# Altium PCB PDB.PcbDoc
Units mil, origin at the board's own origin, x right, y up, seen from the top; angles counter-clockwise.
Board outline 3900 x 2400 mil, 2 copper layers (Top Layer, Bottom Layer); 19 components, 6 nets, 44 pads, 695 vias.
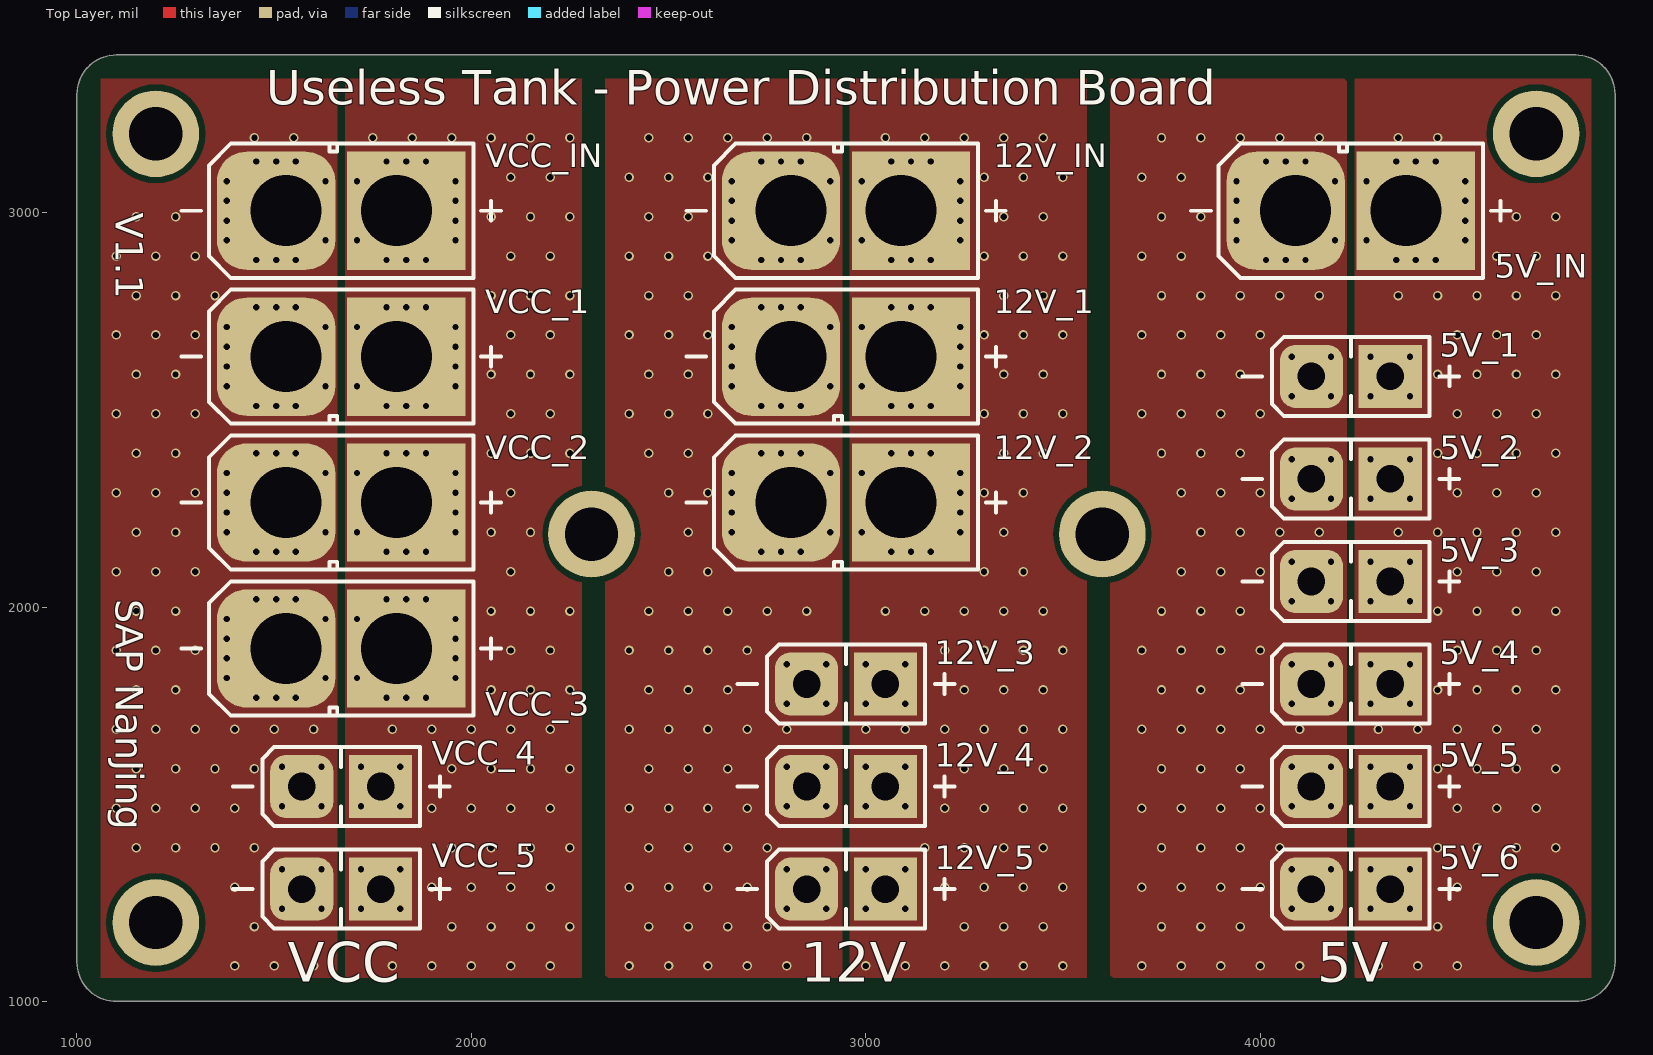
[diagram p0: Top Layer view]
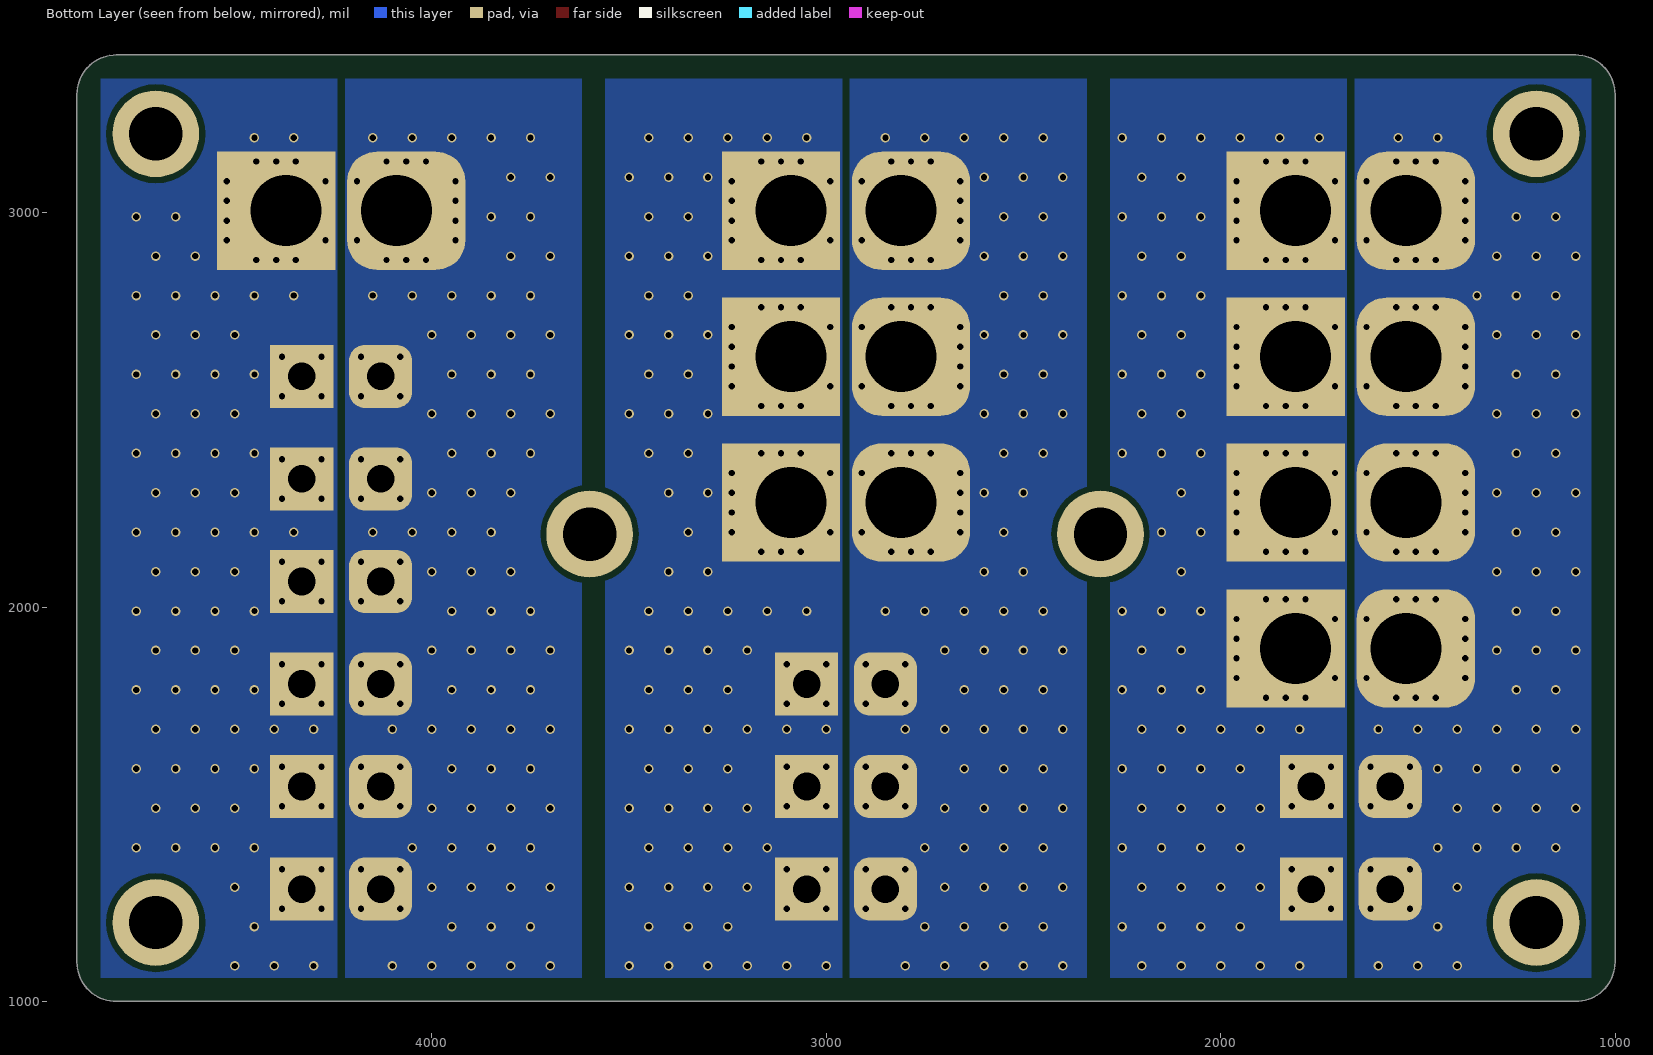
[diagram p1: Bottom Layer view, seen from below]

## Layer stack, top to bottom
Top Solder: solder mask 0.4, Solder Resist, Dk 3.5
Top Layer: signal copper 1.4
Dielectric 1: dielectric 12.6, FR-4, Dk 4.8
Bottom Layer: signal copper 1.4
Bottom Solder: solder mask 0.4, Solder Resist, Dk 3.5

## Board outline
1000,1100 1000,3300 cw(c1100,3300) 1100,3400 4800,3400 cw(c4800,3300) 4900,3300 4900,1100 cw(c4800,1100) 4800,1000 1100,1000 cw(c1100,1100)

## Design rules (kind name [scope] priority, off if disabled: settings)
Clearance [All] p1: gap=15
HoleSize [All] p1: absolutevalues=TRUE maxlimit=200 minlimit=12 maxpercent=80.000 minpercent=20.000
PolygonConnect "Full Connect" [All] p1: connectstyle=Direct reliefconductorwidth=10 reliefentries=4 polygonreliefangle="90 Angle" airgapwidth=10
PolygonConnect [All] p2: connectstyle=Relief reliefconductorwidth=10 reliefentries=4 polygonreliefangle="90 Angle" airgapwidth=10
RoutingVias [All] p1: holewidth=16 width=24 viastyle="Through Hole" minholewidth=8 minwidth=14 maxholewidth=50 maxwidth=80
SolderMaskExpansion [All] p1: expansion=4
Width [All] p1: maxlimit=10 minlimit=8 preferedwidth=10
29 further rules are at their usual default settings.

## Components (designator, comment, footprint, x,y, rotation, side; value= is the part's Value field where it differs from the comment)
5V_1 "Header XT30/60/90" XT30UPB-F 4130,2585 r0 top
5V_2 "Header XT30/60/90" XT30UPB-F 4130,2325 r0 top
5V_3 "Header XT30/60/90" XT30UPB-F 4130,2065 r0 top
5V_4 "Header XT30/60/90" XT30UPB-F 4130,1805 r0 top
5V_5 "Header XT30/60/90" XT30UPB-F 4130,1545 r0 top
5V_6 "Header XT30/60/90" XT30UPB-F 4130,1285 r0 top
5V_IN "Header XT30/60/90" XT60PB-M 4090,3005 r0 top
12V_1 "Header XT30/60/90" XT60PB-F 2810,2635 r0 top
12V_2 "Header XT30/60/90" XT60PB-F 2810,2265 r0 top
12V_3 "Header XT30/60/90" XT30UPB-F 2850,1805 r0 top
12V_4 "Header XT30/60/90" XT30UPB-F 2850,1545 r0 top
12V_5 "Header XT30/60/90" XT30UPB-F 2850,1285 r0 top
12V_IN "Header XT30/60/90" XT60PB-M 2810,3005 r0 top
VCC_1 "Header XT30/60/90" XT60PB-F 1530,2635 r0 top
VCC_2 "Header XT30/60/90" XT60PB-F 1530,2265 r0 top
VCC_3 "Header XT30/60/90" XT60PB-F 1530,1895 r0 top
VCC_4 "Header XT30/60/90" XT30UPB-F 1570,1545 r0 top
VCC_5 "Header XT30/60/90" XT30UPB-F 1570,1285 r0 top
VCC_IN "Header XT30/60/90" XT60PB-M 1530,3005 r0 top

## Footprints (in the part's own frame and the unit in brackets; to place one, negate y for a bottom-side part, rotate by r counter-clockwise, add the part's x,y. Pads: shape width x height; smd on the part's side, far side on the other; paste and mask are expansions set on the pad)
XT30UPB-F [mil]
  rrect50% 160x160 hole 70: GND(0,0)
  rect 160x160 hole 70: VCC(200,0)
  silkscreen extent -175,-100 375,100
XT60PB-F [mil]
  rrect50% 300x300 hole 180 copper offset -25,0: GND(0,0)
  rect 300x300 hole 180 copper offset 25,0: VCC(280,0)
  silkscreen extent -265,-170 545,170
XT60PB-M [mil]
  rrect50% 300x300 hole 180 copper offset -25,0: GND(0,0)
  rect 300x300 hole 180 copper offset 25,0: VCC(280,0)
  silkscreen extent -265,-170 545,170

## Free pads (board coordinates)
  round 220 hole 135: ""(1200,1200) ""(1200,3200) ""(2305,2185) ""(3600,2185) ""(4700,1200) ""(4700,3200)

## Via types
v1: diameter 24, hole 16, Top Layer to Bottom Layer, tented both sides, 415 vias
v2: diameter 24, hole 16, Top Layer to Bottom Layer, 280 vias

## Nets (pads, with @x,y where several pads share a name; then routed paths per layer and width w, separated by ;. In a path a pad name is that pad's centre, name@x,y a point inside that pad or via, vN(x,y) a via of type N, cw(c..) or ccw(c..) an arc to the next point about the centre after c; other vN are vias at no path point)
Net5V_1_GND: 5V_1.GND 5V_2.GND 5V_3.GND 5V_4.GND 5V_5.GND 5V_6.GND 5V_IN.GND
  other v1: 3700,1090 3800,1090 3900,1090 4000,1090 4100,1090 3750,1190 3850,1190 3950,1190 3700,1290 3800,1290 3900,1290 4000,1290 3750,1390 3850,1390 3950,1390 4050,1390 3700,1490 3800,1490 3900,1490 4000,1490 3750,1590 3850,1590 3950,1590 3700,1690 3800,1690 3900,1690 4000,1690 4100,1690 3750,1790 3850,1790 3950,1790 3700,1890 3800,1890 3900,1890 4000,1890 3750,1990 3850,1990 3950,1990 3800,2090 3900,2090 4000,2090 3850,2190 3950,2190 4050,2190 4150,2190 3800,2290 3900,2290 4000,2290 3750,2390 3850,2390 3950,2390 3700,2490 3800,2490 3900,2490 4000,2490 3750,2590 3850,2590 3950,2590 3700,2690 3800,2690 3900,2690 4000,2690 3750,2790 3850,2790 3950,2790 4050,2790 4150,2790 3700,2890 3800,2890 3750,2990 3850,2990 3700,3090 3800,3090 3750,3190 3850,3190 3950,3190 4050,3190 4150,3190
  other v2: 4080,1235 4180,1235 4080,1335 4180,1335 4080,1495 4180,1495 4080,1595 4180,1595 4080,1755 4180,1755 4080,1855 4180,1855 4080,2015 4180,2015 4080,2115 4180,2115 4080,2275 4180,2275 4080,2375 4180,2375 4080,2535 4180,2535 4080,2635 4180,2635 4015,2880 4065,2880 4115,2880 3940,2930 4190,2930 3940,2980 3940,3030 3940,3080 4190,3080 4015,3130 4065,3130 4115,3130
Net5V_1_VCC: 5V_1.VCC 5V_2.VCC 5V_3.VCC 5V_4.VCC 5V_5.VCC 5V_6.VCC 5V_IN.VCC
  other v1: 4300,1090 4400,1090 4500,1090 4450,1190 4500,1290 4450,1390 4550,1390 4650,1390 4750,1390 4500,1490 4600,1490 4700,1490 4450,1590 4550,1590 4650,1590 4750,1590 4300,1690 4400,1690 4500,1690 4600,1690 4700,1690 4450,1790 4550,1790 4650,1790 4750,1790 4500,1890 4600,1890 4700,1890 4450,1990 4550,1990 4650,1990 4750,1990 4500,2090 4600,2090 4700,2090 4350,2190 4450,2190 4550,2190 4650,2190 4750,2190 4500,2290 4600,2290 4700,2290 4450,2390 4550,2390 4650,2390 4750,2390 4500,2490 4600,2490 4700,2490 4450,2590 4550,2590 4650,2590 4750,2590 4500,2690 4600,2690 4700,2690 4350,2790 4450,2790 4550,2790 4650,2790 4750,2790 4600,2890 4700,2890 4650,2990 4750,2990 4350,3190 4450,3190
  other v2: 4280,1235 4380,1235 4280,1335 4380,1335 4280,1495 4380,1495 4280,1595 4380,1595 4280,1755 4380,1755 4280,1855 4380,1855 4280,2015 4380,2015 4280,2115 4380,2115 4280,2275 4380,2275 4280,2375 4380,2375 4280,2535 4380,2535 4280,2635 4380,2635 4345,2880 4395,2880 4445,2880 4270,2930 4520,2930 4520,2980 4520,3030 4270,3080 4520,3080 4345,3130 4395,3130 4445,3130
Net12V_1_GND: 12V_1.GND 12V_2.GND 12V_3.GND 12V_4.GND 12V_5.GND 12V_IN.GND
  other v1: 2400,1090 2500,1090 2600,1090 2700,1090 2800,1090 2450,1190 2550,1190 2650,1190 2750,1190 2400,1290 2500,1290 2600,1290 2700,1290 2450,1390 2550,1390 2650,1390 2750,1390 2400,1490 2500,1490 2600,1490 2700,1490 2450,1590 2550,1590 2650,1590 2400,1690 2500,1690 2600,1690 2700,1690 2800,1690 2450,1790 2550,1790 2650,1790 2400,1890 2500,1890 2600,1890 2700,1890 2450,1990 2550,1990 2650,1990 2750,1990 2850,1990 2500,2090 2600,2090 2550,2190 2500,2290 2600,2290 2450,2390 2550,2390 2400,2490 2500,2490 2600,2490 2450,2590 2550,2590 2400,2690 2500,2690 2600,2690 2450,2790 2550,2790 2400,2890 2500,2890 2600,2890 2450,2990 2550,2990 2400,3090 2500,3090 2600,3090 2450,3190 2550,3190 2650,3190 2750,3190 2850,3190
  other v2: 2800,1235 2900,1235 2800,1335 2900,1335 2800,1495 2900,1495 2800,1595 2900,1595 2800,1755 2900,1755 2800,1855 2900,1855 2735,2140 2785,2140 2835,2140 2660,2190 2910,2190 2660,2240 2660,2290 2660,2340 2910,2340 2735,2390 2785,2390 2835,2390 2735,2510 2785,2510 2835,2510 2660,2560 2910,2560 2660,2610 2660,2660 2660,2710 2910,2710 2735,2760 2785,2760 2835,2760 2735,2880 2785,2880 2835,2880 2660,2930 2910,2930 2660,2980 2660,3030 2660,3080 2910,3080 2735,3130 2785,3130 2835,3130
Net12V_1_VCC: 12V_1.VCC 12V_2.VCC 12V_3.VCC 12V_4.VCC 12V_5.VCC 12V_IN.VCC
  other v1: 3000,1090 3100,1090 3200,1090 3300,1090 3400,1090 3500,1090 3250,1190 3350,1190 3450,1190 3200,1290 3300,1290 3400,1290 3500,1290 3150,1390 3250,1390 3350,1390 3450,1390 3200,1490 3300,1490 3400,1490 3500,1490 3250,1590 3350,1590 3450,1590 3000,1690 3100,1690 3200,1690 3300,1690 3400,1690 3500,1690 3250,1790 3350,1790 3450,1790 3200,1890 3300,1890 3400,1890 3500,1890 3050,1990 3150,1990 3250,1990 3350,1990 3450,1990 3300,2090 3400,2090 3350,2190 3300,2290 3400,2290 3350,2390 3450,2390 3300,2490 3400,2490 3500,2490 3350,2590 3450,2590 3300,2690 3400,2690 3500,2690 3350,2790 3450,2790 3300,2890 3400,2890 3500,2890 3350,2990 3450,2990 3300,3090 3400,3090 3500,3090 3050,3190 3150,3190 3250,3190 3350,3190 3450,3190
  other v2: 3000,1235 3100,1235 3000,1335 3100,1335 3000,1495 3100,1495 3000,1595 3100,1595 3000,1755 3100,1755 3000,1855 3100,1855 3065,2140 3115,2140 3165,2140 2990,2190 3240,2190 3240,2240 3240,2290 2990,2340 3240,2340 3065,2390 3115,2390 3165,2390 3065,2510 3115,2510 3165,2510 2990,2560 3240,2560 3240,2610 3240,2660 2990,2710 3240,2710 3065,2760 3115,2760 3165,2760 3065,2880 3115,2880 3165,2880 2990,2930 3240,2930 3240,2980 3240,3030 2990,3080 3240,3080 3065,3130 3115,3130 3165,3130
NetVCC_1_GND: VCC_1.GND VCC_2.GND VCC_3.GND VCC_4.GND VCC_5.GND VCC_IN.GND
  other v1: 1400,1090 1500,1090 1600,1090 1450,1190 1400,1290 1150,1390 1250,1390 1350,1390 1450,1390 1100,1490 1200,1490 1300,1490 1400,1490 1150,1590 1250,1590 1350,1590 1450,1590 1100,1690 1200,1690 1300,1690 1400,1690 1500,1690 1600,1690 1150,1790 1250,1790 1100,1890 1200,1890 1300,1890 1150,1990 1250,1990 1100,2090 1200,2090 1300,2090 1150,2190 1250,2190 1100,2290 1200,2290 1300,2290 1150,2390 1250,2390 1100,2490 1200,2490 1300,2490 1150,2590 1250,2590 1100,2690 1200,2690 1300,2690 1150,2790 1250,2790 1350,2790 1100,2890 1200,2890 1300,2890 1150,2990 1250,2990 1450,3190 1550,3190
  other v2: 1520,1235 1620,1235 1520,1335 1620,1335 1520,1495 1620,1495 1520,1595 1620,1595 1455,1770 1505,1770 1555,1770 1380,1820 1630,1820 1380,1870 1380,1920 1380,1970 1630,1970 1455,2020 1505,2020 1555,2020 1455,2140 1505,2140 1555,2140 1380,2190 1630,2190 1380,2240 1380,2290 1380,2340 1630,2340 1455,2390 1505,2390 1555,2390 1455,2510 1505,2510 1555,2510 1380,2560 1630,2560 1380,2610 1380,2660 1380,2710 1630,2710 1455,2760 1505,2760 1555,2760 1455,2880 1505,2880 1555,2880 1380,2930 1630,2930 1380,2980 1380,3030 1380,3080 1630,3080 1455,3130 1505,3130 1555,3130
NetVCC_1_VCC: VCC_1.VCC VCC_2.VCC VCC_3.VCC VCC_4.VCC VCC_5.VCC VCC_IN.VCC
  other v1: 1800,1090 1900,1090 2000,1090 2100,1090 2200,1090 1950,1190 2050,1190 2150,1190 2250,1190 1900,1290 2000,1290 2100,1290 2200,1290 1950,1390 2050,1390 2150,1390 2250,1390 1900,1490 2000,1490 2100,1490 2200,1490 1950,1590 2050,1590 2150,1590 2250,1590 1800,1690 1900,1690 2000,1690 2100,1690 2200,1690 2050,1790 2150,1790 2250,1790 2100,1890 2200,1890 2050,1990 2150,1990 2250,1990 2100,2090 2050,2190 2150,2190 2100,2290 2050,2390 2150,2390 2250,2390 2100,2490 2200,2490 2050,2590 2150,2590 2250,2590 2100,2690 2200,2690 2050,2790 2150,2790 2250,2790 2100,2890 2200,2890 2050,2990 2150,2990 2250,2990 2100,3090 2200,3090 1750,3190 1850,3190 1950,3190 2050,3190 2150,3190 2250,3190
  other v2: 1720,1235 1820,1235 1720,1335 1820,1335 1720,1495 1820,1495 1720,1595 1820,1595 1785,1770 1835,1770 1885,1770 1710,1820 1960,1820 1960,1870 1960,1920 1710,1970 1960,1970 1785,2020 1835,2020 1885,2020 1785,2140 1835,2140 1885,2140 1710,2190 1960,2190 1960,2240 1960,2290 1710,2340 1960,2340 1785,2390 1835,2390 1885,2390 1785,2510 1835,2510 1885,2510 1710,2560 1960,2560 1960,2610 1960,2660 1710,2710 1960,2710 1785,2760 1835,2760 1885,2760 1785,2880 1835,2880 1885,2880 1710,2930 1960,2930 1960,2980 1960,3030 1710,3080 1960,3080 1785,3130 1835,3130 1885,3130

## Polygon pours and split planes (outlines as drawn)
Net5V_1_VCC on Top Layer "Top Layer-Net5V_1_VCC" (solid, pour order 41): 4240,1060 4840,1060 4840,3340 4240,3340
Net5V_1_GND on Top Layer "Top Layer-Net5V_1_GND" (solid, pour order 37): 4220,3340 3620,3340 3620,1060 4220,1060
Net12V_1_VCC on Top Layer "Top Layer-Net12V_1_VCC" (solid, pour order 33): 2960,3340 3560,3340 3560,1060 2960,1060
Net12V_1_GND on Top Layer "Top Layer-Net12V_1_GND 1" (solid, pour order 26): 2940,3340 2340,3340 2340,1060 2940,1060
NetVCC_1_VCC on Top Layer "Top Layer-NetVCC_1_VCC" (solid, pour order 22): 1680,3340 2280,3340 2280,1060 1680,1060
NetVCC_1_GND on Top Layer "Top Layer-NetVCC_1_GND" (solid, pour order 18): 1660,3340 1060,3340 1060,1060 1660,1060
Net5V_1_VCC on Bottom Layer "Bottom Layer-Net5V_1_VCC" (solid, pour order 43): 4240,3340 4840,3340 4840,1060 4240,1060
Net5V_1_GND on Bottom Layer "Bottom Layer-Net5V_1_GND" (solid, pour order 39): 4220,3340 3620,3340 3620,1060 4220,1060
Net12V_1_VCC on Bottom Layer "Bottom Layer-Net12V_1_VCC" (solid, pour order 35): 3560,1060 2960,1060 2960,3340 3560,3340
Net12V_1_GND on Bottom Layer "Bottom Layer-Net12V_1_GND 1" (solid, pour order 31): 2940,3340 2340,3340 2340,1060 2940,1060
NetVCC_1_VCC on Bottom Layer "Bottom Layer-NetVCC_1_VCC" (solid, pour order 24): 2280,3340 1680,3340 1680,1060 2280,1060
NetVCC_1_GND on Bottom Layer "Bottom Layer-NetVCC_1_GND" (solid, pour order 20): 1660,3340 1060,3340 1060,1060 1660,1060

## Silkscreen, mask and mechanical layers (free items; w line width, h text height)
Top Overlay:
  text "Useless Tank - Power Distribution Board" at 1480,3245 h150
  text "V1.1" at 1075,3000 h120 r270
  text "SAP NanJing" at 1075,2020 h120 r270
  text "VCC" at 1535,1050 h100
  text "12V" at 2835,1050 h100
  text "5V" at 4145,1050 h100
Mechanical 1:
  the board outline again, w10
Drill Drawing:
  lines w3.33: 5168.12,1245 5218.12,1245 5193.12,1195 5168.12,1245 ; 5168.12,1357.5 5180.62,1357.5 5180.62,1345 5205.62,1345 5205.62,1357.5 5218.12,1357.5 5218.12,1382.5 5205.62,1382.5 5205.62,1395 5180.62,1395 5180.62,1382.5 5168.12,1382.5 5168.12,1357.5 ; 5168.12,1507.5 5180.62,1507.5 5193.12,1495 5205.62,1507.5 5218.12,1507.5 5205.62,1520 5218.12,1532.5 5205.62,1532.5 5193.12,1545 5180.62,1532.5 5168.12,1532.5 5180.62,1520 5168.12,1507.5 ; 5168.12,1645 5168.12,1657.5 5180.62,1670 5168.12,1682.5 5168.12,1695 5180.62,1695 5193.12,1682.5 5205.62,1695 5218.12,1695 5218.12,1682.5 5205.62,1670 5218.12,1657.5 5218.12,1645 5205.62,1645 5193.12,1657.5 5180.62,1645 5168.12,1645
  lines w15: 5100,1150 8978.97,1150 ; 5100,1750 8978.97,1750 ; 5650.88,1000 5650.88,1900 ; 6348.69,1000 6348.69,1900 ; 7694.29,1000 7694.29,1900 ; 8200.17,1000 8200.17,1900 ; 5100,1000 8978.97,1000 8978.97,1900 5100,1900 5100,1000
  text "Symbol" at 5190,1795 h72
  text "Hit Count" at 5695.88,1795 h72
  text "Finished Hole Size" at 6393.69,1795 h72
  text "Plated" at 7739.29,1795 h72
  text "Hole Type" at 8245.17,1795 h72
  text "6" at 5695.88,1645 h60
  text "135.00mil (3.429mm)" at 6393.69,1645 h60
  text "PTH" at 7739.29,1645 h60
  text "Round" at 8245.17,1645 h60
  text "16" at 5695.88,1495 h60
  text "180.00mil (4.572mm)" at 6393.69,1495 h60
  text "PTH" at 7739.29,1495 h60
  text "Round" at 8245.17,1495 h60
  text "22" at 5695.88,1345 h60
  text "70.00mil (1.778mm)" at 6393.69,1345 h60
  text "PTH" at 7739.29,1345 h60
  text "Round" at 8245.17,1345 h60
  text "695" at 5695.88,1195 h60
  text "16.00mil (0.406mm)" at 6393.69,1195 h60
  text "PTH" at 7739.29,1195 h60
  text "Round" at 8245.17,1195 h60
  text "739 Total" at 5695.88,1045 h60